# Altium PCB DC-DC TPS564208DDCT-PCB.PcbDoc
Units mil, origin at the board's own origin, x right, y up, seen from the top; angles counter-clockwise.
Board outline not stored, 2 copper layers (Top Layer, Bottom Layer); 11 components, 0 nets, 26 pads, 0 vias.
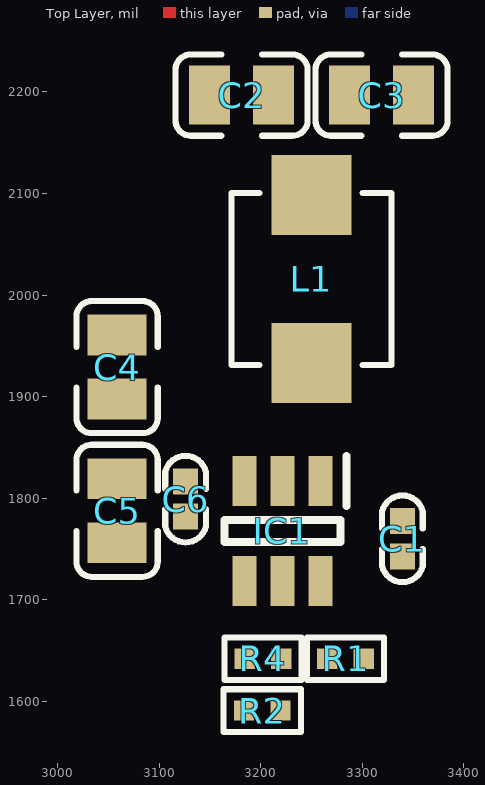
[diagram p0: Top Layer view]
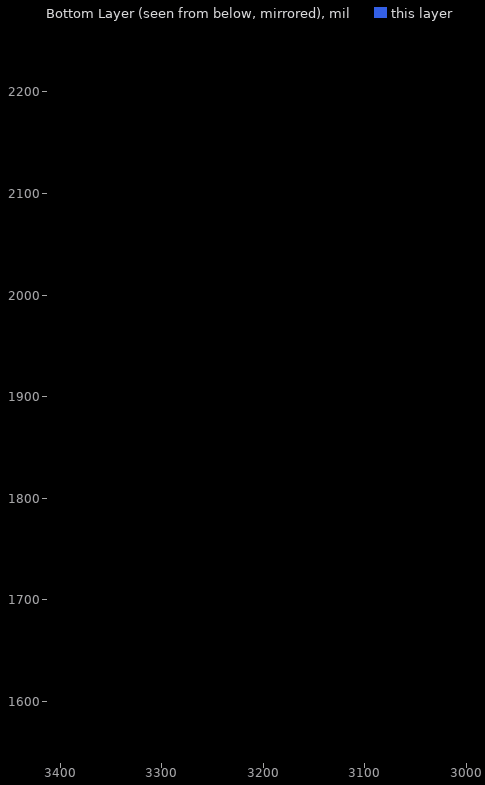
[diagram p1: Bottom Layer view, seen from below]

## Layer stack, top to bottom
Top Solder: solder mask 0.4, Solder Resist, Dk 3.5
Top Layer: signal copper 1.4
Dielectric 1: dielectric 12.6, FR-4, Dk 4.8
Bottom Layer: signal copper 1.4
Bottom Solder: solder mask 0.4, Solder Resist, Dk 3.5

## Components (designator, comment, footprint, x,y, rotation, side; value= is the part's Value field where it differs from the comment)
C1 "100nF 50V" 0402C 3339.42,1760.15 r270 top
C2 "22uF 25V" 0805C 3181.1,2196.85 r0 top
C3 "22uF 25V" 0805C 3318.9,2196.85 r180 top
C4 "10uF 50V" 0805C 3058.62,1929.13 r90 top
C5 "10uF 50V" 0805C 3058.61,1787.71 r270 top
C6 "100nF 50V" 0402C 3125.98,1799.21 r270 top
IC1 "TPS564208DDCT" SOT95P280X110-6N 3221.31,1768.03 r270 top
L1 "3.3uH 4A" SMD4.3*4*2 3249.78,2015.74 r270 top
R1 "10K" 0402R 3283.47,1642.04 r0 top
R2 "54.9k" 0402R 3201.47,1591.1 r0 top
R4 "10k" 0402R 3202.1,1642.04 r180 top

## Footprints (in the part's own frame and the unit in brackets; to place one, negate y for a bottom-side part, rotate by r counter-clockwise, add the part's x,y. Pads: shape width x height; smd on the part's side, far side on the other; paste and mask are expansions set on the pad)
0402C [mm]
  rect 0.65x0.62 smd: 1(-0.44,0) 2(0.44,0)
  silkscreen extent -1.08,-0.51 1.08,0.51, body extent -0.51,-0.27 0.49,0.27, height 0.55
0402R [mil]
  rect 20x20 smd: 1(-18,0) 2(18,0)
  silkscreen extent -38,-21 38,21, body extent -20,-11 20,11, height 16
0805C [mm]
  rect 1.02x1.47 smd: 1(-0.8,0) 2(0.8,0)
  silkscreen extent -1.65,-1.02 1.65,1.02, body extent -1,-0.62 1,0.63, height 0.88
SMD4.3*4*2 [mm]
  rect 2x2 smd: 1(-2.1,0) 2(2.1,0)
  silkscreen extent -2.15,-2 2.15,2, body extent -2.17,-2 2.15,1.99, height 1.5
SOT95P280X110-6N [mm]
  rect 1.25x0.6 smd: 1(-1.25,0.95) 2(-1.25,0) 3(-1.25,-0.95) 4(1.25,-0.95) 5(1.25,0) 6(1.25,0.95)
  silkscreen extent -1.88,-1.45 0.28,1.6, body extent -1.4,-1.45 1.4,1.45, height 1.1

## Part data
C1 C2 C3 C4 C5 C6: library part CAP-NP
IC1: "Integrated Circuit", Manufacturer_Name="Texas Instruments", Mouser Part Number=595-TPS564208DDCT, RS Part Number=1330753P, ComponentLink1Description=LCSC, ComponentLink1URL=https://item.szlcsc.com/494549.html, ComponentLink2Description=PDF, ComponentLink2URL=file:///C:/Users/58218/Downloads/C486062_TPS564208DDCR_2020-01-18%20(1).PDF, Datasheet Link=http://www.ti.com/lit/ds/symlink/tps564208.pdf, Height=1.1mm, Manufacturer_Part_Number=TPS564208DDCT, Mouser Price/Stock=https://www.mouser.com/Search/Refine.aspx?Keyword=595-TPS564208DDCT, RS Price/Stock=http://uk.rs-online.com/web/p/products/1330753P
L1: library part INDUCTOR, "CMLF0504-3R3MTT"
R1 R2 R4: library part RES

## Nets (pads, with @x,y where several pads share a name; then routed paths per layer and width w, separated by ;. In a path a pad name is that pad's centre, name@x,y a point inside that pad or via, vN(x,y) a via of type N, cw(c..) or ccw(c..) an arc to the next point about the centre after c; other vN are vias at no path point)
pads on no net: C1.1 C1.2 C2.1 C2.2 C3.1 C3.2 C4.1 C4.2 C5.1 C5.2 C6.1 C6.2 IC1.1 IC1.2 IC1.3 IC1.4 IC1.5 IC1.6 L1.1 L1.2 R1.1 R1.2 R2.1 R2.2 R4.1 R4.2